# EAGLE board pled_dim_reg (EAGLE 5.06)
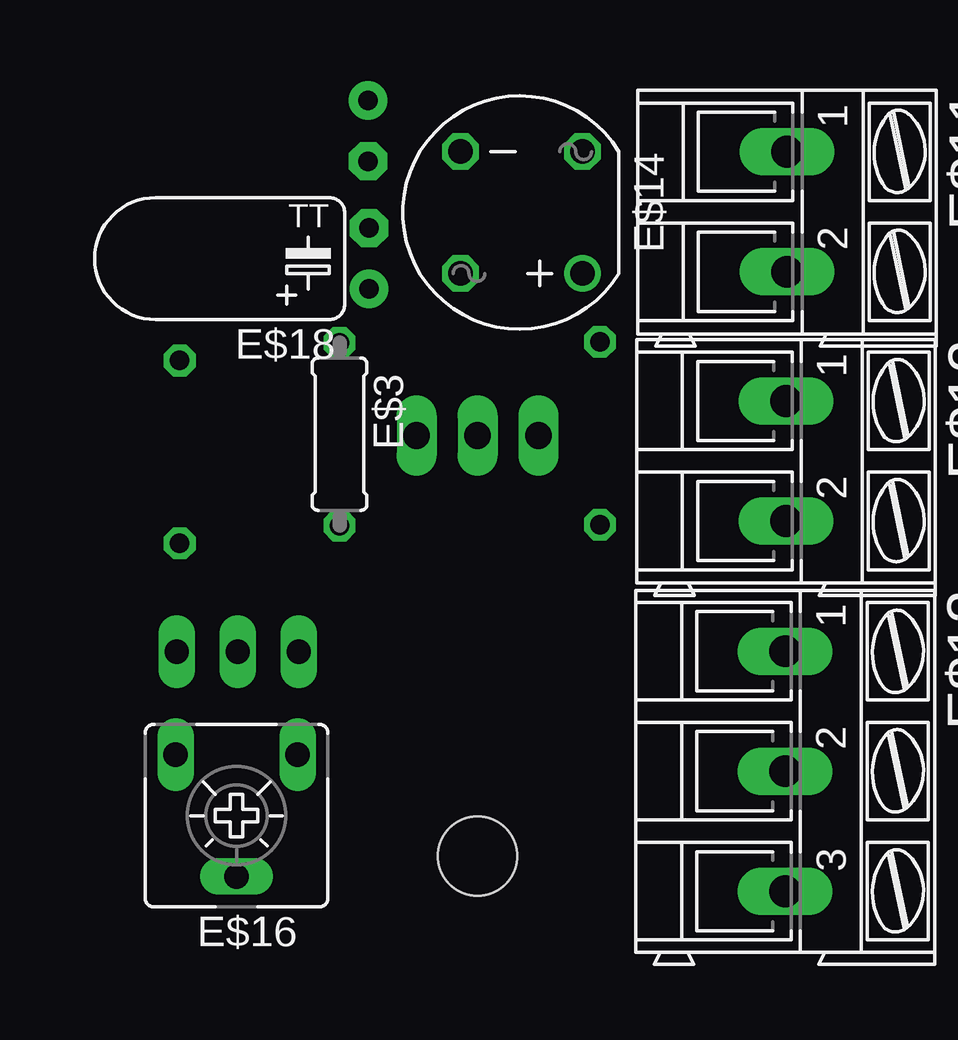
[diagram p0: board, top side]
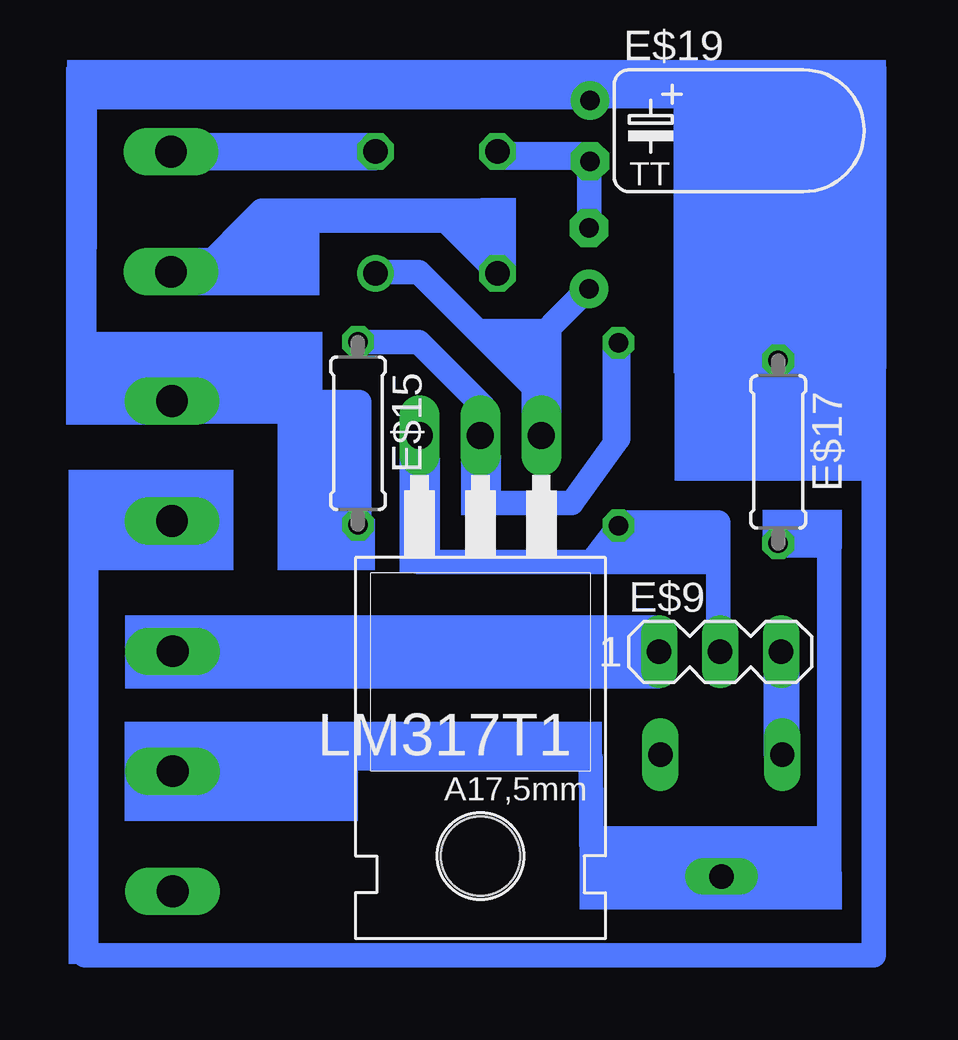
[diagram p1: board, bottom side, seen from below]

No outline drawn. Coordinates in mm, seen from the top.
Copper layers (1*16): Top 0.035mm / dielectric 1.5mm / Bottom 0.035mm
Design rules "default": minimum track width 10mil, minimum drill 24mil, track to track 8mil, track to pad 8mil, pad to pad 8mil, via to via 8mil, smd to smd 8mil, copper to edge 40mil, drill to drill 8mil, minimum pad ring 10mil, minimum via ring 8mil, stop-mask expansion 4mil, vias tented up to drill 0mil, thermal gap 10mil

## Footprints (pad centres in the part's own frame; a part is rotated, then mirrored left to right if it is on the bottom)
0207/7 = drill 0.813 octagon: 1 -3.81,0; 2 3.81,0
MA03-1 = drill 1.016 long: 1 -2.54,0; 2 0,0; 3 2.54,0
AK300/2 = drill 1.321 long: 1 -2.515,0; 2 2.489,0
AK300/3 = drill 1.321 long: 1 -5.004,0; 2 0,0; 3 5.004,0
RB1A = drill 1.016 round: + -2.54,2.54 | drill 1.016 octagon: - 2.54,-2.54; AC1 2.54,2.54; AC2 -2.54,-2.54
CA6V = drill 1.016 long: A -2.54,-2.54; E 2.54,-2.54; S 0,2.54
TT2D5L = drill 0.813 pad 1.6 round: + -1.27,0 | drill 0.813 pad 1.6 octagon: - 1.27,0
TO220 = drill 1.118 long: 1 -2.54,-6.35; 2 0,-6.35; 3 2.54,-6.35 | hole 3.302: 0,11.176

## Placement (x,y rotation side)
E$3  [0207/7]  12.31,23.17 270 top
E$9  [MA03-1]  8.07,14.1 0 bottom
E$11  [AK300/2]  30.95,32.43 270 top
E$12  [AK300/2]  30.91,22.04 270 top
E$13  [AK300/3]  30.88,9.12 270 top
E$14  [RB1A]  19.89,32.41 180 top
E$15  [0207/7]  23.16,23.21 270 bottom
E$16  [CA6V]  8.02,7.27 180 top
E$17  [0207/7]  5.65,22.43 270 bottom
E$18  [TT2D5L]  13.54,30.49 90 top
E$19  [TT2D5L]  13.5,35.82 270 bottom
LM317T1  [TO220]  18.06,16.76 180 bottom

## Library data of the parts
E$3 E$15 E$17 = resistor
E$9 = con-lstb
E$11-E$13 = con-ptr500
E$14 = rectifier
E$16 = pot
E$18 E$19 = rcl
LM317T1 = transistor

## Nets
S$28: E$17.1

## Tracks (layer width: path | path; a pad name or v marks a point on that pad's centre or on a via)
S$1
  Bottom 1.016: 31,19.5 34.48,19.5 34.48,1.45
S$2
  Bottom 1.016: 8.03,4.73 3.52,4.73 3.52,18.54 5.64,18.54 5.64,18.61
S$3
  Bottom 1.016: 30.97,9.66 13.46,9.66 13.42,4.75 7.92,4.75
S$4
  Bottom 1.016: 34.55,1.45 1.68,1.45 1.68,26.13 5.85,26.13 5.85,26.27
S$15
  Bottom 1.016: 22.44,34.92 22.44,35.01 31,35.01
S$16
  Bottom 1.016: 17.31,29.88 19.91,32.48 27.16,32.48 29.72,29.92 31.06,29.92
S$17
  Bottom 1.016: 23.1,19.4 23.1,24.52 30.94,24.52
S$18
  Bottom 1.016: 17.94,24.32 20.62,27 23.22,27
S$19
  Bottom 1.016: 15.5,24.13 15.5,24.8 20.62,29.92 22.43,29.92 22.51,29.84
S$20
  Bottom 1.016: 18.14,23.18 18.14,20.31 14.26,20.31 12.31,22.99 12.31,27
S$21
  Bottom 1.016: 20.64,23.07 20.64,17.85 13.42,17.85 12.25,19.36
S$22
  Bottom 1.016: 13.52,31.82 13.52,34.85 17.31,34.85
S$23
  Bottom 1.016: 13.56,29.24 16.63,26.16
S$24
  Bottom 1.016: 13.5,37.21 34.55,37.21 34.56,24.51 31.01,24.51 31,24.35
S$25
  Bottom 1.016: 30.87,14.13 10.54,14.13
S$26
  Bottom 1.016: 12.25,19.48 8.15,19.48 8.15,13.96
S$27
  Bottom 1.016: 5.52,14.09 5.55,14.09 5.55,9.77
S$28
  Bottom 1.016: 13.71,37.26 5.65,37.26 E$17.1
(copper drawn outside any net)
  shapes: Bottom area x44